# EAGLE board SIT315 - Interrupt system design (EAGLE 9.7.0)

Size 324.88 x 59.69 mm. Coordinates in mm from the lower left corner, seen from the top.
Outline: 0,0 324.88,0 324.88,59.69 0,59.69 0,0
Copper layers (1*16): Top 0.035mm / dielectric 1.5mm / Bottom 0.035mm
Design rules "default": minimum track width 6mil, minimum drill 0.35mm, track to track 6mil, track to pad 6mil, pad to pad 6mil, via to via 6mil, smd to smd 6mil, copper to edge 40mil, drill to drill 6mil, minimum pad ring 10mil, minimum via ring 8mil, stop-mask expansion 4mil, vias tented up to drill 0mil, thermal gap 10mil

## Footprints (pad centres in the part's own frame; a part is rotated, then mirrored left to right if it is on the bottom)
LEDRD254W60D565H860B = drill 0.981 pad 1.581: 1 -1.27,0; 2 1.27,0
PIEZO = drill 1 pad 1.6: 1 -3.5,0; 2 3.5,0
28015 = drill 1.016 long: 1 -2.54,0; 2 0,0; 3 2.54,0
GL5528 = drill 0.8 pad 1.4: 1 -1.702,0; 2 1.702,0
RESAD1016W63L850D250B = drill 0.83 pad 1.43: 1 -5.08,0; 2 5.08,0
SWITCH-MOMENTARY-PTH-6.5MM = drill 1.016 pad 1.88: 1 -3.251,2.261; 2 3.251,2.261; 3 -3.251,-2.261; 4 3.251,-2.261
ARDUINO-UNO-R3-SHIELD = drill 1.016 pad 1.88: 3.3V 24.13,-2.54; 5V 24.13,0; A0 24.13,12.7; A1 24.13,15.24; A2 24.13,17.78; A3 24.13,20.32; A4 24.13,22.86; A5 24.13,25.4; AREF -24.13,-13.97; D2 -24.13,20.32; D3 -24.13,17.78; D4 -24.13,15.24; D5 -24.13,12.7; D6 -24.13,10.16; D7 -24.13,7.62; D8 -24.13,3.81; D9 -24.13,1.27; D10 -24.13,-1.27; D11 -24.13,-3.81; D12 -24.13,-6.35; D13 -24.13,-8.89; GND@0 24.13,2.54; GND@1 24.13,5.08; GND@2 -24.13,-11.43; IOREF 24.13,-7.62; NC 24.13,-10.16; RES 24.13,-5.08; RX -24.13,25.4; SCL -24.13,-19.05; SDA -24.13,-16.51; TX -24.13,22.86; VIN 24.13,7.62

## Placement (x,y rotation side)
D1  RED  [LEDRD254W60D565H860B]  236.61,39.54 0 top
PIEZO1  PIEZO  [PIEZO]  213.75,39.54 0 top
PING1  DISTANCE-SENSOR-3PIN  [28015]  298.84,39.54 0 top
R1  PHOTOCELL_GL5528  [GL5528]  262.01,52.24 0 top
RBUZZER_RESISTOR  220  [RESAD1016W63L850D250B]  202.32,37 0 top
RLDR_RESISTOR  10k  [RESAD1016W63L850D250B]  268.36,49.7 0 top
RLED_RESISTOR  220  [RESAD1016W63L850D250B]  230.26,34.46 0 top
S1  SWITCH_MOMENTARY  [SWITCH-MOMENTARY-PTH-6.5MM]  248.04,43.35 90 top
U1  ARDUINO-UNO-R3-SHIELD  [ARDUINO-UNO-R3-SHIELD]  47.88,29.84 270 top

## Library data of the parts
D1 = Tinkercad; CATEGORY: Opto-Electronic; SUB-CATEGORY: LED; VALUE: LED_RED
PIEZO1 PING1 R1 RBUZZER_RESISTOR RLDR_RESISTOR RLED_RESISTOR S1 U1 = Tinkercad

## Nets
D1_A: D1.1 RLED_RESISTOR.2
PIEZO1_1: PIEZO1.1 RBUZZER_RESISTOR.2
U1_5V: PING1.2 R1.1 U1.5V
U1_A0: R1.2 RLDR_RESISTOR.1 U1.A0
U1_D6: RBUZZER_RESISTOR.1 U1.D6
U1_D8: PING1.3 U1.D8
U1_D9: S1.3 S1.4 U1.D9
U1_D13: RLED_RESISTOR.1 U1.D13
U1_GND: D1.2 PIEZO1.2 PING1.1 RLDR_RESISTOR.2 S1.1 S1.2 U1.GND@0 U1.GND@1 U1.GND@2

## Tracks (layer width: path | path; a pad name or v marks a point on that pad's centre or on a via)
D1_A  (1 unrouted)
PIEZO1_1  (1 unrouted)
U1_5V  (2 unrouted)
U1_A0  (2 unrouted)
U1_D6  (1 unrouted)
U1_D8  (1 unrouted)
U1_D9  (2 unrouted)
U1_D13  (1 unrouted)
U1_GND  (8 unrouted)